# EAGLE board Carrier Motor Driver (EAGLE 9.6.2)
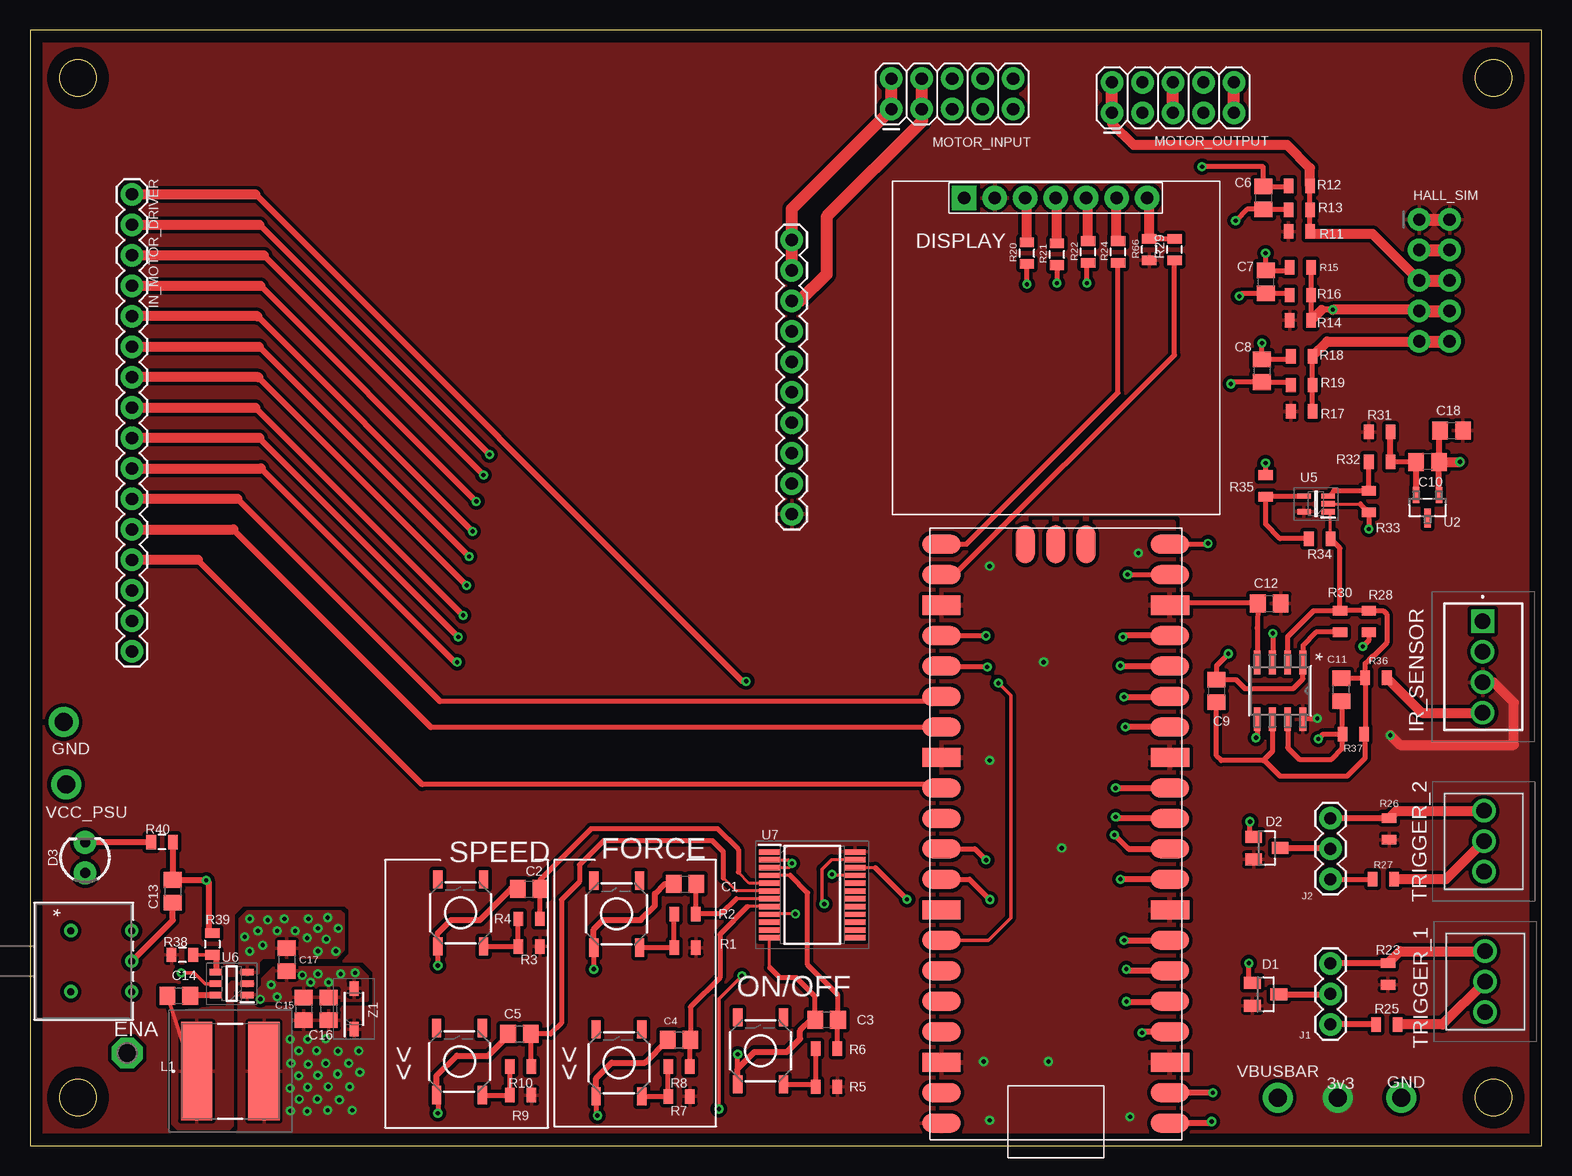
[diagram p0: board, top side]
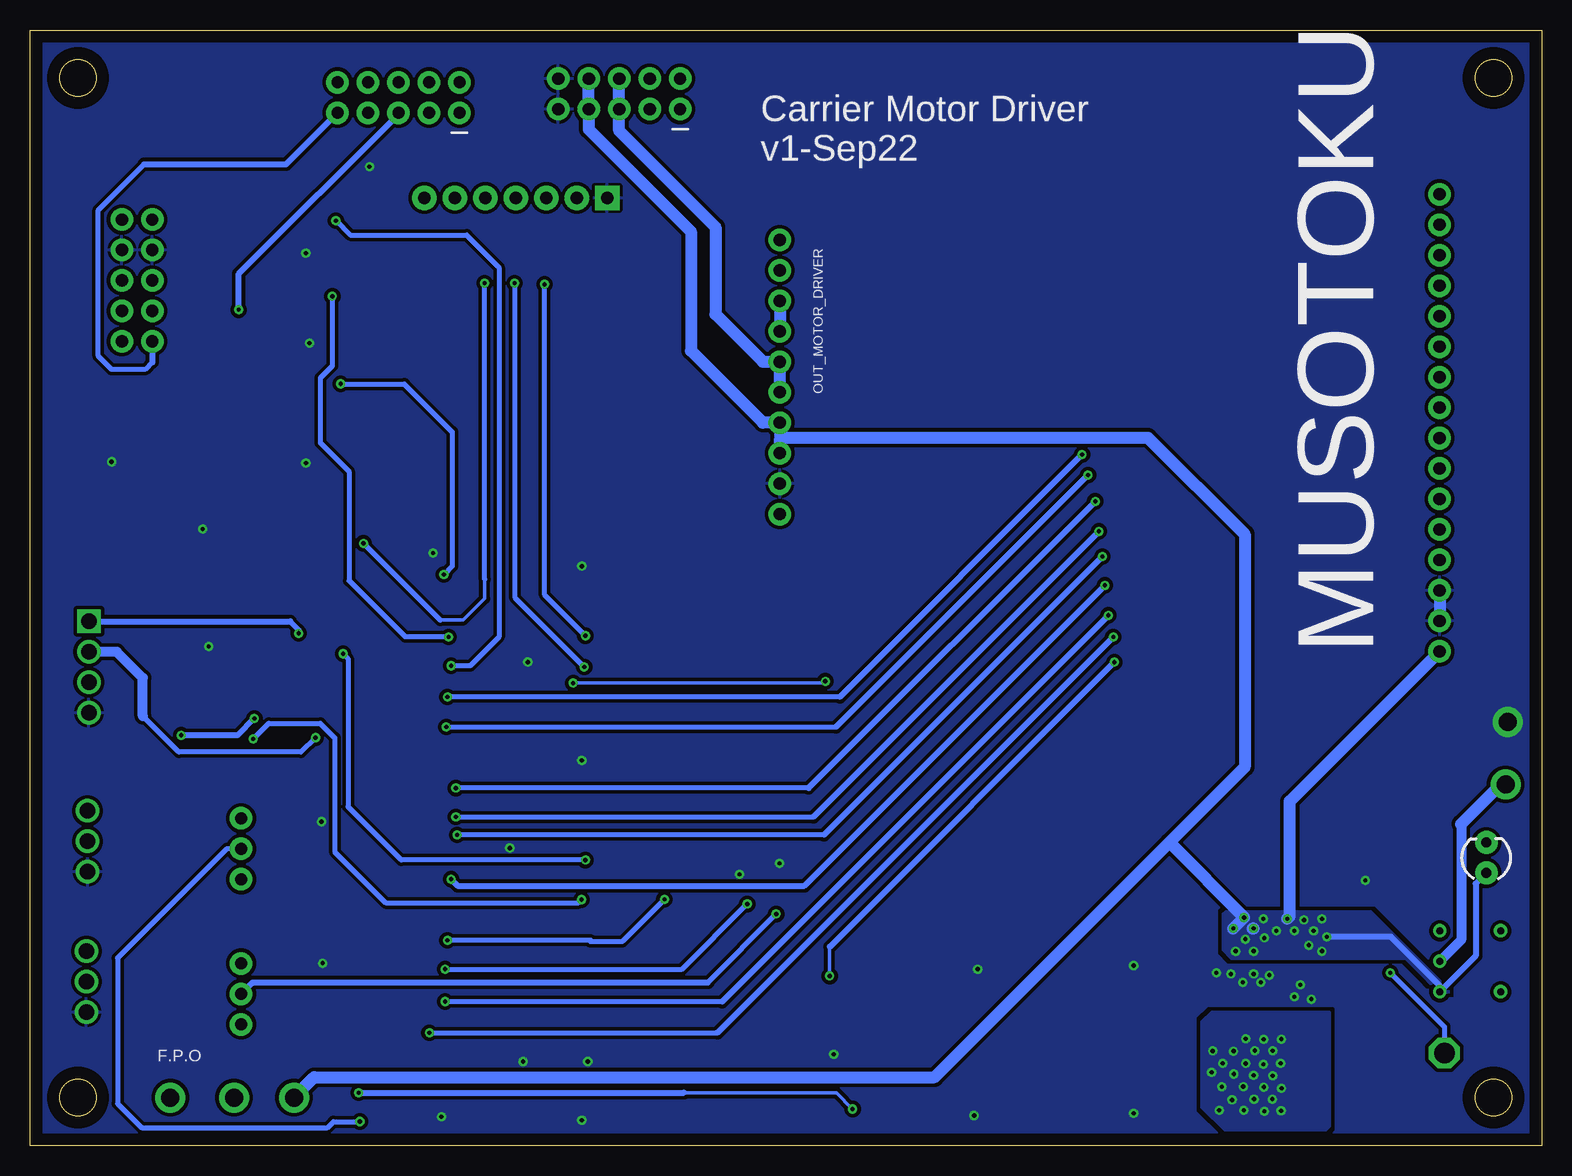
[diagram p1: board, bottom side, seen from below]

Size 126 x 93 mm. Coordinates in mm from the lower left corner, seen from the top.
Outline: 0,0 126,0 126,93 0,93 0,0
Outline: circle at 122,4 radius 1.5
Outline: circle at 122,89 radius 1.5
Outline: circle at 4,89 radius 1.5
Outline: circle at 4,4 radius 1.5
Copper layers (1*16): Top 0.035mm / dielectric 1.5mm / Bottom 0.035mm
Design rules "default *": minimum track width 6mil, minimum drill 0.35mm, track to track 12mil, track to pad 12mil, pad to pad 12mil, via to via 12mil, smd to smd 6mil, copper to edge 40mil, drill to drill 6mil, minimum pad ring 10mil, minimum via ring 8mil, stop-mask expansion 4mil, vias tented up to drill 0mil, thermal gap 10mil

## Footprints (pad centres in the part's own frame; a part is rotated, then mirrored left to right if it is on the bottom)
C0805 = smd 1.3 x 1.5: 1 -0.95,0; 2 0.95,0
SOT23 = smd 1 x 1.4: 1 -0.95,-1.1; 2 0.95,-1.1; 3 0,1.1
LED_3MM = drill 0.813 pad 1.88: A -1.27,0; K 1.27,0
OLED_LCD = drill 1.016 pad 2.032 square: 1 -7.42,13.7 | drill 1.016 pad 2.032: 2 -4.88,13.7; 3 -2.34,13.7; 4 0.2,13.7; 5 2.74,13.7; 6 5.28,13.7; 7 7.82,13.7
TESTPAD_P1-17 = drill 1.702 pad 2.54 octagon: TP 0,0
2X5_NOSILK = drill 1.016 pad 1.88: 1 0,0; 2 0,2.54; 3 2.54,0; 4 2.54,2.54; 5 5.08,0; 6 5.08,2.54; 7 7.62,0; 8 7.62,2.54; 9 10.16,0; 10 10.16,2.54
1X16 = drill 1.016 pad 1.88: 1 0,0; 2 2.54,0; 3 5.08,0; 4 7.62,0; 5 10.16,0; 6 12.7,0; 7 15.24,0; 8 17.78,0; 9 20.32,0; 10 22.86,0; 11 25.4,0; 12 27.94,0; 13 30.48,0; 14 33.02,0; 15 35.56,0; 16 38.1,0
OSTVN04A150 = drill 1.3 pad 1.95 square: 1 0,0 | drill 1.3 pad 1.95: 2 2.54,0; 3 5.08,0; 4 7.62,0
1X03 = drill 1.016 pad 1.88: 1 0,0; 2 2.54,0; 3 5.08,0
SRN80408R2Y = smd 2.6 x 8.2: 1 -2.8,0; 2 2.8,0
2X5 = drill 1.016 pad 1.88: 1 0,0; 2 0,2.54; 3 2.54,0; 4 2.54,2.54; 5 5.08,0; 6 5.08,2.54; 7 7.62,0; 8 7.62,2.54; 9 10.16,0; 10 10.16,2.54
1X10 = drill 1.016 pad 1.88: 1 0,0; 2 2.54,0; 3 5.08,0; 4 7.62,0; 5 10.16,0; 6 12.7,0; 7 15.24,0; 8 17.78,0; 9 20.32,0; 10 22.86,0
0805 = smd 0.8 x 1.2: 1 -0.9,0; 2 0.9,0
TACTILE_SWITCH_SMD_5.2MM = smd 1.524 x 0.762: 1 -2.794,1.905; 2 2.794,1.905; 3 -2.794,-1.905; 4 2.794,-1.905
OSTVN03A150 = drill 1.3 pad 1.95: 1 0,0; 2 2.54,0; 3 5.08,0
SOIC8-N_MC_MCH = smd 1.981 x 0.559: 1 -2.362,1.905; 2 -2.362,0.635; 3 -2.362,-0.635; 4 -2.362,-1.905; 5 2.362,-1.905; 6 2.362,-0.635; 7 2.362,0.635; 8 2.362,1.905
DBZ3 = smd 0.559 x 1.321: 1 -0.95,-1.016; 2 0.95,-1.016 | smd 0.559 x 1.587: 3 0,0.883
SPDT05_ATE1D_9P5X8_NDC = drill 0.61 pad 1.118: 1 5.08,5.08; 2 2.54,5.08; 3 0,5.08; 4 0,0; 5 5.08,0
RPI_PICO = smd 3.2 x 1.6: 3V3 9.525,13.97; 3V3_EN 9.525,16.51; ADC_VREF 9.525,11.43; AGND 9.525,6.35; GND@1 -9.525,19.05; GND@2 -9.525,6.35; GND@3 -9.525,-6.35; GND@4 -9.525,-19.05; GND@6 9.525,-19.05; GND@7 9.525,-6.35; GND@8 9.525,19.05; GP0 -9.525,24.13; GP1 -9.525,21.59; GP2 -9.525,16.51; GP3 -9.525,13.97; GP4 -9.525,11.43; GP5 -9.525,8.89; GP6 -9.525,3.81; GP7 -9.525,1.27; GP8 -9.525,-1.27; GP9 -9.525,-3.81; GP10 -9.525,-8.89; GP11 -9.525,-11.43; GP12 -9.525,-13.97; GP13 -9.525,-16.51; GP14 -9.525,-21.59; GP15 -9.525,-24.13; GP16 9.525,-24.13; GP17 9.525,-21.59; GP18 9.525,-16.51; GP19 9.525,-13.97; GP20 9.525,-11.43; GP21 9.525,-8.89; GP22 9.525,-3.81; GP26_A0 9.525,1.27; GP27_A1 9.525,3.81; GP28_A2 9.525,8.89; RUN 9.525,-1.27; VBUS 9.525,24.13; VSYS 9.525,21.59 | smd 1.6 x 3.2: GND@5 0,-24.13; SWCLK -2.54,-24.13; SWDIO 2.54,-24.13
SOT65P210X110-5N = smd 1.15 x 0.45: 1 -1,0.65; 2 -1,0; 3 -1,-0.65; 4 1,-0.65; 5 1,0.65
SOT95P280X100-6N = smd 1.05 x 0.55: 1 -1.3,0.95; 2 -1.3,0; 3 -1.3,-0.95; 4 1.3,-0.95; 5 1.3,0; 6 1.3,0.95
SOP65P780X200-24N = smd 1.8 x 0.45: 1 -3.55,3.575; 2 -3.55,2.925; 3 -3.55,2.275; 4 -3.55,1.625; 5 -3.55,0.975; 6 -3.55,0.325; 7 -3.55,-0.325; 8 -3.55,-0.975; 9 -3.55,-1.625; 10 -3.55,-2.275; 11 -3.55,-2.925; 12 -3.55,-3.575; 13 3.55,-3.575; 14 3.55,-2.925; 15 3.55,-2.275; 16 3.55,-1.625; 17 3.55,-0.975; 18 3.55,-0.325; 19 3.55,0.325; 20 3.55,0.975; 21 3.55,1.625; 22 3.55,2.275; 23 3.55,2.925; 24 3.55,3.575
SOD3716X135N = smd 1.2 x 0.75: 1 -1.7,0; 2 1.7,0

## Placement (x,y rotation side)
C1  [C0805]  54.6,21.8 0 top
C2  [C0805]  41.6,21.4 0 top
C3  [C0805]  66.4,10.5 0 top
C4  [C0805]  54.1,8.8 0 top
C5  [C0805]  40.8,9.3 0 top
C6  [C0805]  102.8,79 270 top
C7  [C0805]  103,72 270 top
C8  [C0805]  102.7,64.6 270 top
C9  [C0805]  98.9,37.9 270 top
C10  [C0805]  116.5,57 180 top
C11  [C0805]  109.3,38 90 top
C12  [C0805]  103.3,45.2 0 top
C13  [C0805]  11.9,21.2 270 top
C14  [C0805]  12.4,12.5 0 top
C15  [C0805]  22.8,11.4 270 top
C16  [C0805]  24.9,11.4 270 top
C17  [C0805]  21.4,15.5 270 top
C18  [C0805]  118.5,59.6 0 top
D1  BAT54S  [SOT23]  103,12.6 270 top
D2  BAT54S  [SOT23]  103.1,24.8 270 top
D3  [LED_3MM]  4.6,24 90 top
DISPLAY  Display  [OLED_LCD]  85.3,65.3 0 top
ENA  TESTPAD_TPSQPAD1-17  [TESTPAD_P1-17]  8.1,7.7 0 top
HALL_SIM  [2X5_NOSILK]  115.8,77.2 270 top
IN_MOTOR_DRIVER  [1X16]  8.5,79.3 270 top
IR_SENSOR  OSTVN04A150  [OSTVN04A150]  121.1,43.7 270 top
J1  [1X03]  108.4,10.1 90 top
J2  [1X03]  108.4,22.2 90 top
L1  SRN8040-8R2Y  [SRN80408R2Y]  16.7,6.2 0 top
MOTOR_INPUT  [2X5]  71.8,86.4 0 top
MOTOR_OUTPUT  [2X5]  90.2,86.1 0 top
OUT_MOTOR_DRIVER  [1X10]  63.5,75.5 270 top
R1  [0805]  54.6,16.5 0 top
R2  [0805]  54.6,19.3 180 top
R3  [0805]  41.6,16.6 0 top
R4  [0805]  41.6,18.9 180 top
R5  [0805]  66.4,4.9 0 top
R6  [0805]  66.4,8.1 180 top
R7  [0805]  54.1,4.1 0 top
R8  [0805]  54.1,6.6 180 top
R9  [0805]  40.9,4.2 0 top
R10  [0805]  40.9,6.6 180 top
R11  [0805]  105.8,76.2 180 top
R12  [0805]  105.8,80 0 top
R13  [0805]  105.8,78 0 top
R14  [0805]  105.9,68.8 180 top
R15  [0805]  105.9,73.2 0 top
R16  [0805]  105.9,70.9 0 top
R17  [0805]  106,61.2 180 top
R18  [0805]  106,65.8 0 top
R19  [0805]  106,63.4 0 top
R20  33  [0805]  83.1,74.4 90 top
R21  33  [0805]  85.6,74.3 90 top
R22  33  [0805]  88.2,74.5 90 top
R23  [0805]  113.2,14.3 90 top
R24  33  [0805]  90.7,74.5 90 top
R25  [0805]  113.1,10.1 0 top
R26  [0805]  113.3,26.4 90 top
R27  [0805]  112.8,22.2 0 top
R28  [0805]  111.6,43.7 90 top
R29  33  [0805]  95.4,74.7 90 top
R30  [0805]  109.2,43.7 270 top
R31  [0805]  112.5,59.5 180 top
R32  [0805]  112.5,57 180 top
R33  [0805]  111.6,53.7 270 top
R34  [0805]  107.5,50.6 180 top
R35  [0805]  103,55 90 top
R36  [0805]  112.2,39 180 top
R37  [0805]  110.3,34.3 180 top
R38  10K  [0805]  12.7,15.9 180 top
R39  10K  [0805]  15.2,16.8 270 top
R40  10K  [0805]  11,25.3 180 top
R66  10K  [0805]  93.3,74.7 90 top
S1  MOMENTARY-SWITCH-SPST-SMD-5.2MM  [TACTILE_SWITCH_SMD_5.2MM]  48.9,19.3 90 top
S2  MOMENTARY-SWITCH-SPST-SMD-5.2MM  [TACTILE_SWITCH_SMD_5.2MM]  35.9,19.4 90 top
S3  MOMENTARY-SWITCH-SPST-SMD-5.2MM  [TACTILE_SWITCH_SMD_5.2MM]  60.9,7.9 90 top
S4  MOMENTARY-SWITCH-SPST-SMD-5.2MM  [TACTILE_SWITCH_SMD_5.2MM]  49.1,6.9 90 top
S5  MOMENTARY-SWITCH-SPST-SMD-5.2MM  [TACTILE_SWITCH_SMD_5.2MM]  35.8,7 90 top
TRIGGER_1  OSTVN03A150  [OSTVN03A150]  121.3,16.2 270 top
TRIGGER_2  OSTVN03A150  [OSTVN03A150]  121.2,27.9 270 top
U1  MCP6002T-I/SN  [SOIC8-N_MC_MCH]  104.2,37.9 270 top
U2  LM4040BIM3-2.0/NOPB  [DBZ3]  116.5,53.2 180 top
U3  ATE1D-5M3-10-Z  [SPDT05_ATE1D_9P5X8_NDC]  3.4,17.9 270 top
U4  [RPI_PICO]  85.5,26 180 top
U5  MCP6001T-I_LT  [SOT65P210X110-5N]  107.2,53.5 180 top
U6  AP62200WU-7  [SOT95P280X100-6N]  16.8,13.5 180 top
U7  PCF8575DB  [SOP65P780X200-24N]  65.2,20.9 0 top
Z1  BZT52C3V6-7-F  [SOD3716X135N]  27,11.4 90 top

## Library data of the parts
C1-C18 = rcl; SPICEPREFIX: C
D1 D2 = diode
D3 = SparkFun-LED; PROD_ID: DIO-08794
DISPLAY = EDCPSU
ENA = BeagleBone_Blue_R3
HALL_SIM IN_MOTOR_DRIVER J1 J2 = SparkFun-Connectors
IR_SENSOR = OSTVN04A150; ARROW_PART_NUMBER: OSTVN04A150; ARROW_PRICE-STOCK: https://www.arrow.com/en/products/ostvn04a150/on-shore-technology?region=nac; DESCRIPTION: Conn Terminal Block 4 POS 2.54mm Solder ST Thru-Hole 6A; HEIGHT: 8.8mm; MANUFACTURER_NAME: On-Shore Technology, Inc; MANUFACTURER_PART_NUMBER: OSTVN04A150
L1 = SRN8040-8R2Y; ARROW_PART_NUMBER: SRN8040-8R2Y; ARROW_PRICE-STOCK: https://www.arrow.com/en/products/srn8040-8r2y/bourns; DESCRIPTION: Bourns, SRN8040, 8040 Shielded Wire-wound SMD Inductor with a Ferrite Core, 8.2 uH +/-30% Wire-Wound 4A Idc; HEIGHT: 4mm; MANUFACTURER_NAME: Bourns; MANUFACTURER_PART_NUMBER: SRN8040-8R2Y; MOUSER_PART_NUMBER: 652-SRN8040-8R2Y; MOUSER_PRICE-STOCK: https://www.mouser.co.uk/ProductDetail/Bourns/SRN8040-8R2Y?qs=opBjA1TV903pPxFXaQmF%2Fw%3D%3D
MOTOR_INPUT MOTOR_OUTPUT = SparkFun-Connectors; PROD_ID: CONN-08499; SF_ID: PRT-0778
OUT_MOTOR_DRIVER = SparkFun-Connectors; PROD_ID: CONN-11563
R1-R19 R23 R25-R28 R30-R37 = SparkFun-Resistors
R20-R22 R24 R29 R38-R40 R66 = SparkFun
S1-S5 = SparkFun-Switches; PROD_ID: SWCH-08247; SF_SKU: COM-08720
TRIGGER_1 TRIGGER_2 = OSTVN03A150; ARROW_PART_NUMBER: OSTVN03A150; ARROW_PRICE-STOCK: https://www.arrow.com/en/products/ostvn03a150/on-shore-technology; DESCRIPTION: OSTVN03A150; HEIGHT: 8.8mm; MANUFACTURER_NAME: On-Shore Technology, Inc; MANUFACTURER_PART_NUMBER: OSTVN03A150
U1 = MCP6002T; COPYRIGHT: Copyright (C) 2022 Ultra Librarian. All rights reserved.; DIGI-KEY_PART_NUMBER_1: MCP6002T-I/SNCT-ND; DIGI-KEY_PART_NUMBER_2: MCP6002T-I/SNDKR-ND; DIGI-KEY_PART_NUMBER_3: MCP6002T-I/SNTR-ND; MANUFACTURER_PART_NUMBER: MCP6002T-I/SN; MFR_NAME: Microchip
U2 = lm4040; DATASHEET_URL: http://www.ti.com/lit/gpn/LM4040D50; DESCRIPTION: 5-V Precision Micropower Shunt Voltage Reference, 1% accuracy; FAMILY_NAME: SHUNT VOLTAGE REFERENCE; GENERIC_PART_NUMBER: LM4040D50; INDUSTRY_STD_PKG_TYPE: SOT-23; MANUFACTURER: Texas Instruments; MANUFACTURER_PART_NUMBER: LM4040BIM3-2.0/NOPB; PACKAGE_DESIGNATOR: DBZ; PIN_COUNT: 3; VENDOR: Texas Instruments
U3 = ATE1D-5M3-10-Z; COPYRIGHT: Copyright (C) 2022 Ultra Librarian. All rights reserved.; DIGI-KEY_PART_NUMBER_1: 563-1158-ND; MANUFACTURER_PART_NUMBER: ATE1D-5M3-10-Z; MFR_NAME: Nidec Copal Electronics
U4 = RaspberryPi_Pico
U5 = MCP6001T-I_LT; ARROW_PART_NUMBER: MCP6001T-I/LT; ARROW_PRICE-STOCK: https://www.arrow.com/en/products/mcp6001t-ilt/microchip-technology?region=nac; DESCRIPTION: Microchip MCP6001T-I/LT Low Power Op Amp, 1MHz Rail-Rail, 1.8 6 V, 5-Pin SC-70; HEIGHT: 1.1mm; MANUFACTURER_NAME: Microchip; MANUFACTURER_PART_NUMBER: MCP6001T-I/LT; MOUSER_PART_NUMBER: 579-MCP6001T-I/LT; MOUSER_PRICE-STOCK: https://www.mouser.co.uk/ProductDetail/Microchip-Technology-Atmel/MCP6001T-I-LT?qs=Q%2Fw7XRh99il03y7Zr5Ze0Q%3D%3D
U6 = AP62200WU-7; ARROW_PART_NUMBER: AP62200WU-7; ARROW_PRICE-STOCK: https://www.arrow.com/en/products/ap62200wu-7/diodes-incorporated?region=nac; DESCRIPTION: Switching Voltage Regulators DCDC Conv HV Buck TSOT26 T&R 3K; HEIGHT: 1mm; MANUFACTURER_NAME: Diodes Inc.; MANUFACTURER_PART_NUMBER: AP62200WU-7; MOUSER_PART_NUMBER: 621-AP62200WU-7; MOUSER_PRICE-STOCK: https://www.mouser.co.uk/ProductDetail/Diodes-Incorporated/AP62200WU-7?qs=P1JMDcb91o6Lrrt3Idazjw%3D%3D
U7 = PCF8575DB; ARROW_PART_NUMBER: PCF8575DB; ARROW_PRICE-STOCK: https://www.arrow.com/en/products/pcf8575db/texas-instruments?region=nac; DESCRIPTION: Interface - I/O Expanders Remote 16B I2C and SMBus I/O Expander; HEIGHT: 2mm; MANUFACTURER_NAME: Texas Instruments; MANUFACTURER_PART_NUMBER: PCF8575DB; MOUSER_PART_NUMBER: 595-PCF8575DB; MOUSER_PRICE-STOCK: https://www.mouser.co.uk/ProductDetail/Texas-Instruments/PCF8575DB?qs=fJz2RDGtR42Mo54dhvfjsQ%3D%3D
Z1 = BZT52C3V6-7-F; ARROW_PART_NUMBER: BZT52C3V6-7-F; ARROW_PRICE-STOCK: https://www.arrow.com/en/products/bzt52c3v6-7-f/diodes-incorporated?region=nac; DESCRIPTION: Diodes Inc BZT52C3V6-7-F Zener Diode, 3.6V 6% 500 mW SMT 2-Pin SOD-123; HEIGHT: 1.35mm; MANUFACTURER_NAME: Diodes Inc.; MANUFACTURER_PART_NUMBER: BZT52C3V6-7-F; MOUSER_PART_NUMBER: 621-BZT52C3V6-F; MOUSER_PRICE-STOCK: https://www.mouser.co.uk/ProductDetail/Diodes-Incorporated/BZT52C3V6-7-F?qs=We1mx2pNWM9dxcfB67aIQA%3D%3D

## Nets
CS: DISPLAY.7 R29.2 R66.2
D0: DISPLAY.3 R20.2
D1: DISPLAY.4 R21.2
DSP_RST: R22.1 U4.GP15
EN_0: IN_MOTOR_DRIVER.4 U4.GP9
EN_1: IN_MOTOR_DRIVER.2 U4.GP11
EN_2: IN_MOTOR_DRIVER.8 U4.GP3
EN_3: IN_MOTOR_DRIVER.6 U4.GP7
EN_4: IN_MOTOR_DRIVER.12 U4.GP21
EN_5: IN_MOTOR_DRIVER.10 U4.GP1
EN_DCDC: ENA.TP U6.5
FRC_DOWN: C4.2 R8.1 U7.8
FRC_UP: C1.2 R2.1 U7.7
GND: C1.1 C2.1 C3.1 C4.1 C5.1 C6.1 C7.1 C8.1 C10.1 C12.1 C13.1 C15.1 C16.1 C17.2 C18.1 D1.1 D2.1 DISPLAY.1 HALL_SIM.3 HALL_SIM.4 IN_MOTOR_DRIVER.14 IN_MOTOR_DRIVER.15 IR_SENSOR.4 MOTOR_INPUT.9 MOTOR_INPUT.10 OUT_MOTOR_DRIVER.9 R12.1 R15.1 R18.1 R28.1 R33.2 R35.2 R36.1 R39.1 R40.1 S1.1 S2.1 S3.1 S4.1 S5.1 TRIGGER_1.3 TRIGGER_2.3 U1.4 U2.1 U4.GND@1 U4.GND@2 U4.GND@3 U4.GND@4 U4.GND@6 U4.GND@7 U4.GND@8 U5.2 U6.1 U7.2 U7.3 U7.12 U7.21 Z1.2
HALL_A: HALL_SIM.5 HALL_SIM.6 MOTOR_OUTPUT.1 MOTOR_OUTPUT.2 R11.1 R12.2 R13.2
HALL_B: HALL_SIM.7 HALL_SIM.8 MOTOR_OUTPUT.5 MOTOR_OUTPUT.6 R14.1 R15.2 R16.2
HALL_C: HALL_SIM.9 HALL_SIM.10 MOTOR_OUTPUT.9 MOTOR_OUTPUT.10 R17.1 R18.2 R19.2
IN_SENSOR_1: IR_SENSOR.1 U1.3
IN_SENSOR_2: IR_SENSOR.2 U1.5
ISENSE: IN_MOTOR_DRIVER.1 U4.GP28_A2
MISO: R24.1 U4.GP16
MOSI: R21.1 U4.GP19
MOTOR_A: MOTOR_INPUT.1 MOTOR_INPUT.2 OUT_MOTOR_DRIVER.1 OUT_MOTOR_DRIVER.2
MOTOR_B: MOTOR_INPUT.3 MOTOR_INPUT.4 OUT_MOTOR_DRIVER.3 OUT_MOTOR_DRIVER.4
MOTOR_C: MOTOR_INPUT.5 MOTOR_INPUT.6 OUT_MOTOR_DRIVER.5 OUT_MOTOR_DRIVER.6
N$1: R1.1 R2.2 S1.3
N$3: R3.1 R4.2 S2.3
N$5: R5.1 R6.2 S3.3
N$6: R34.2 R35.1 U5.4
N$7: R7.1 R8.2 S4.3
N$8: R32.2 R33.1 U5.3
N$9: R9.1 R10.2 S5.3
N$10: C10.2 R31.1 R32.1 U2.2
N$17: DISPLAY.6 R24.2
N$18: J2.3 R26.2 TRIGGER_2.1
N$19: R27.2 TRIGGER_2.2
N$21: J1.3 R23.2 TRIGGER_1.1
N$22: R25.2 TRIGGER_1.2
N$23: J2.1 R27.1
N$24: J1.1 R25.1
N$28: D3.K R40.2
N$31: C14.2 U6.6
N$32: C14.1 L1.1 U6.2
N$33: R38.1 R39.2 U6.4
ON/OFF: C3.2 R6.1 U7.4
PWM_IN_0: IN_MOTOR_DRIVER.5 U4.GP8
PWM_IN_1: IN_MOTOR_DRIVER.3 U4.GP10
PWM_IN_2: IN_MOTOR_DRIVER.9 U4.GP2
PWM_IN_3: IN_MOTOR_DRIVER.7 U4.GP6
PWM_IN_4: IN_MOTOR_DRIVER.13 U4.GP22
PWM_IN_5: IN_MOTOR_DRIVER.11 U4.GP20
RST: DISPLAY.5 R22.2
SCK: R20.1 U4.GP18
SCL: U4.GP5 U7.22
SDA: U4.GP4 U7.23
SENSOR_1: C9.1 R30.2 U1.1 U4.GP26_A0
SENSOR_2: C11.1 R37.2 U1.7 U4.GP27_A1
SENSOR_A: C6.2 R13.1 U4.GP12
SENSOR_B: C7.2 R16.1 U4.GP13
SENSOR_C: C8.2 R19.1 U4.GP14
SPD_DOWN: C5.2 R10.1 U7.6
SPD_UP: C2.2 R4.1 U7.5
SS: R29.1 U4.GP17
T1: D1.3 J1.2 U7.9
T2: D2.3 J2.2 U4.GP0
V_COMP: C9.2 C11.2 R28.2 R30.1 R34.1 R36.2 R37.1 U1.2 U1.6 U5.1
VBUSBAR: C17.1 D3.A IN_MOTOR_DRIVER.16 MOTOR_INPUT.7 MOTOR_INPUT.8 OUT_MOTOR_DRIVER.7 OUT_MOTOR_DRIVER.8 U3.1 U6.3
VCC: C12.2 C15.2 C16.2 C18.2 D1.2 D2.2 DISPLAY.2 HALL_SIM.1 HALL_SIM.2 IR_SENSOR.3 L1.2 OUT_MOTOR_DRIVER.10 R1.2 R3.2 R5.2 R7.2 R9.2 R11.2 R14.2 R17.2 R23.1 R26.1 R31.2 R38.2 R66.1 U1.8 U4.VBUS U5.5 U7.24 Z1.1
VCC_PSU: C13.2 U3.2

## Tracks (layer width: path | path; a pad name or v marks a point on that pad's centre or on a via)
CS
  Top 0.406: 93.3,78.82 DISPLAY.7 | R66.2 R29.2
  Top 0.813: R66.2 93.3,78.82
D0
  Top 0.406: 83.1,78.86 DISPLAY.3
  Top 0.813: R20.2 83.1,78.86
D1
  Top 0.406: 85.6,78.9 DISPLAY.4
  Top 0.813: R21.2 85.6,78.9
DSP_RST  (via drill 0.35)
  Top 0.406: U4.GP15 98.13,50.13 v98.2,50.2 | v88.1,71.9 88.1,73.5 R22.1
  Bottom 0.305: 91.8,43.8 89.9,43.8 88.1,45.6 88.1,47.2
  Bottom 0.406: v98.2,50.2 91.8,43.8 | 88.1,47.2 v88.1,71.9
EN_0  (via drill 0.35)
  Top 0.406: 95.02,29.8 U4.GP9
  Top 0.508: 19.22,71.68 v37.2,53.7 | v90.5,29.8 95.02,29.8
  Top 0.813: IN_MOTOR_DRIVER.4 19.22,71.68
  Bottom 0.406: 61.1,29.8 v90.5,29.8
  Bottom 0.508: v37.2,53.7 61.1,29.8
EN_1  (via drill 0.35)
  Top 0.406: 95,37.4 U4.GP11
  Top 0.508: 19.14,76.76 v38.3,57.6 | v91.2,37.4 95,37.4
  Top 0.813: IN_MOTOR_DRIVER.2 19.14,76.76
  Bottom 0.406: 58.5,37.4 v91.2,37.4
  Bottom 0.508: v38.3,57.6 58.5,37.4
EN_2  (via drill 0.35)
  Top 0.406: 95,12 U4.GP3
  Top 0.508: 18.78,61.52 v36.1,44.2 | v91.4,12 95,12
  Top 0.813: IN_MOTOR_DRIVER.8 18.78,61.52
  Bottom 0.406: 68.3,12 v91.4,12
  Bottom 0.508: v36.1,44.2 68.3,12
EN_3  (via drill 0.35)
  Top 0.406: v90.4,25.9 91.57,24.73
  Top 0.508: 19.1,66.6 v36.6,49.1 | 91.57,24.73 U4.GP7
  Top 0.813: IN_MOTOR_DRIVER.6 19.1,66.6
  Bottom 0.406: 59.8,25.9 v90.4,25.9
  Bottom 0.508: v36.6,49.1 59.8,25.9
EN_4
  Top 0.406: 33.41,34.89 U4.GP21
  Top 0.508: 16.94,51.36 33.41,34.89
  Top 0.813: IN_MOTOR_DRIVER.12 16.94,51.36
EN_5  (via drill 0.35)
  Top 0.305: v57.43,3.04 57.43,12.22 v59.34,14.13
  Top 0.406: 35.4,40.3 v35.6,40.3 | v98.6,4.4 v98.59,4.41
  Top 0.508: v98.59,4.41 U4.GP1 | 19.26,56.44 35.4,40.3
  Top 0.813: IN_MOTOR_DRIVER.10 19.26,56.44
  Bottom 0.305: 71.5,4.4 58.79,4.4 v57.43,3.04 | v59.34,14.13 59.34,16.56 59.32,16.58
  Bottom 0.508: v35.6,40.3 59.32,16.58 | v98.6,4.4 71.5,4.4
EN_DCDC  (via drill 0.35)
  Top 0.305: U6.5 14.6,13.5 13.7,14.4 12.8,14.4
  Top 0.406: v12.6,14.4 12.8,14.4
  Bottom 0.406: v12.6,14.4 8.1,9.9 ENA.TP
FRC_DOWN
  Top 0.254: U7.8 59.83,19.93
  Top 0.406: R8.1 55,8.75 C4.2 55.05,11.55 57.5,14 57.5,17.6 59.83,19.93
FRC_UP
  Top 0.254: U7.7 58.88,20.57
  Top 0.406: C1.2 55.5,21.75 R2.1 57.6,19.3 58.88,20.57
GND  (via drill 0.35, 1.5 pad 2.5)
  Top 0.254: 61.65,14.85 U7.12 | U5.2 110.9,53.5 | U7.3 63.27,23.18 63.52,23.42 v63.52,23.52 63.22,23.82 U7.2 | U7.21 66.89,22.52 66.86,22.55 v66.86,22.6
  Top 0.305: 14.65,22.15 v14.7,22.1 | R39.1 14.9,18
  Top 0.406: v34,15 v33.99,15.01 S2.1 33.99,17.71 | S5.1 34,4.1 v34,2.7 | S4.1 47.2,2.6 v47.3,2.5 | S3.1 v58.99,7.59 v59,7.6 | S1.1 v46.99,14.71 v47,14.7 | 65.1,10.5 C3.1 65.45,12.45 63.9,14 62.5,14 61.65,14.85 | 52.9,21.8 C1.1 | 40.1,21.4 C2.1 | 39.85,9.15 C5.1 | 84.95,6.95 v84.9,7 | U1.4 102.3,43.14 102.3,43.15 C12.1 102.3,45.25 95.53,45.25 94.92,44.65 94.92,44.95 U4.GND@4 | 110.9,53.5 R33.2 v111.6,51.4 | C18.1 117.45,59.5 | R15.1 104.75,72.95 C7.1 v103,74.4 | R12.1 104.85,79.95 C6.1 102.8,81.6 v97.7,81.6 | R18.1 104.85,65.55 C8.1 v102.7,66.9 | D1.1 101.6,13.85 v101.6,15.2 | D2.1 101.7,26.05 v101.7,27 | R28.1 111.6,42.1 v111.1,41.6 | R35.2 v103,56.9
  Top 0.508: R40.1 C13.1 14.65,22.15 | v14.7,22.1 14.9,21.9 14.9,18 | S3.1 58.99,6.41 60.39,7.8 63.1,7.8 64.2,8.9 64.2,9.6 65.1,10.5 | S1.1 46.99,18.01 47.79,18.8 50.9,18.8 52.1,20 52.1,21 52.9,21.8 | 33.99,17.71 35.09,18.8 37.5,18.8 40.1,21.4 | S4.1 47.2,5.61 48.49,6.9 51.25,6.9 C4.1 | S5.1 33.9,5.79 35.6,7.5 38.2,7.5 39.85,9.15 | U2.1 C10.1 117.45,59.5
  Top 0.813: R36.1 116.02,36.08 IR_SENSOR.4 | C10.1 v119.2,57
  Top 1.016: HALL_SIM.3 HALL_SIM.4
  Bottom 1.016: IN_MOTOR_DRIVER.14 IN_MOTOR_DRIVER.15
  other vias: 19.2,12.2 20.1,13.4 20.6,12.4 22.7,14.2 23.4,13.6 24,14.3 24.9,13.6 25.9,14.3 27.1,14.4 79.5,7 80,2.1 91.7,2.4 86,24.8 80,32.1 84.5,40.3 80,48.3 92.4,49.4 2.8,35.3
  pour Top (rank 2): 17.4,12.7 18.8,12.7 19.4,13.3 19.4,13.9 20.3,14.8 27.4,14.8 28.1,14.1 28.1,12.1 17.4,12.1
  pour Bottom: 17.6,12.6 18.7,12.6 19.3,13.2 19.3,13.8 20.2,14.7 27.3,14.7 28,14 28,12 17.6,12
  pour Top (isolate 0.254): 75,52 95.3,52 95.3,1 76,1 76,51
  pour Bottom (rank 2): -6,97 -6,-4 133,-4 133,97
GND1  (via drill 1.5 pad 2.5)
  other vias: 114.3,4
HALL_A
  Top 0.406: 106.9,76 R11.1 R13.2 R12.2 | 90.2,85.2 MOTOR_OUTPUT.1
  Top 0.813: HALL_SIM.5 111.92,76 106.9,76 | R12.2 106.7,81.5 104.8,83.4 92,83.4 90.2,85.2
  Top 1.016: MOTOR_OUTPUT.1 MOTOR_OUTPUT.2 | HALL_SIM.5 HALL_SIM.6
HALL_B  (via drill 0.35)
  Top 0.406: R14.1 R16.2 R15.2
  Top 0.508: HALL_SIM.7 115.7,69.68 | v108.6,69.68 107.68,69.68
  Top 0.813: 115.7,69.68 v108.6,69.68 | 107.68,69.68 R14.1
  Top 1.016: HALL_SIM.7 HALL_SIM.8 | MOTOR_OUTPUT.5 MOTOR_OUTPUT.6
  Bottom 0.508: v108.6,69.68 108.6,72.68 95.28,86 MOTOR_OUTPUT.5
HALL_C
  Top 0.406: R18.2 R19.2 R17.1
  Top 0.813: R18.2 108.14,67.04 HALL_SIM.9
  Top 1.016: HALL_SIM.9 HALL_SIM.10 | MOTOR_OUTPUT.9 MOTOR_OUTPUT.10
  Bottom 0.406: 115.8,65.3 116.4,64.7 119.2,64.7 120.3,65.8 120.3,78 116.5,81.8
  Bottom 0.508: HALL_SIM.9 115.8,65.3 | 116.5,81.8 104.66,81.8 MOTOR_OUTPUT.9
IN_SENSOR_1  (via drill 0.35)
  Top 0.406: v103.6,42.7 103.6,40.3 U1.3
  Bottom 0.406: v103.6,42.7 103.6,43 104.3,43.7
  Bottom 0.508: IR_SENSOR.1 104.3,43.7
IN_SENSOR_2  (via drill 0.35)
  Top 0.406: U1.5 102.3,34.09 v102.2,34
  Bottom 0.406: v102.2,34 103.4,32.8 113.6,32.8 116.6,35.8
  Bottom 0.813: 116.6,35.8 116.6,39 118.76,41.16 IR_SENSOR.2
ISENSE  (via drill 0.35)
  Top 0.305: U4.GP28_A2 79.88,17.11 81.75,18.98 81.75,37.52 v80.72,38.55
  Top 0.508: v59.7,38.7 59.4,38.7 18.8,79.3
  Top 0.813: IN_MOTOR_DRIVER.1 18.8,79.3
  Bottom 0.305: v80.72,38.55 59.85,38.55 v59.7,38.7
MISO
  Top 0.406: U4.GP16 78.08,50.13 90.7,62.76 R24.1
MOSI  (via drill 0.35)
  Top 0.406: R21.1 v85.6,71.9 | v79.8,39.9 76.05,39.9 U4.GP19
  Bottom 0.406: v85.6,71.9 85.6,45.7 v79.8,39.9
MOTOR_A
  Top 1.016: OUT_MOTOR_DRIVER.2 OUT_MOTOR_DRIVER.1 63.5,78.1 MOTOR_INPUT.1 MOTOR_INPUT.2
MOTOR_B
  Top 1.016: OUT_MOTOR_DRIVER.3 64.2,70.42 66.4,72.62 66.4,77.42 74.34,85.36 MOTOR_INPUT.3 MOTOR_INPUT.4
  Bottom 1.016: OUT_MOTOR_DRIVER.3 OUT_MOTOR_DRIVER.4
MOTOR_C
  Bottom 1.016: OUT_MOTOR_DRIVER.6 OUT_MOTOR_DRIVER.5 64.9,65.34 68.86,69.3 68.86,76.58 76.88,84.6 MOTOR_INPUT.5 MOTOR_INPUT.6
N$1
  Top 0.406: S1.3 R1.1 R2.2
N$3
  Top 0.406: S2.3 R3.1 R4.2
N$5
  Top 0.406: S3.3 65.29,5.11 R5.1 R6.2
N$6
  Top 0.406: R34.2 104.2,50.6 103,51.8 R35.1 103.05,54.15 U5.4
N$7
  Top 0.406: S4.3 R7.1 R8.2
N$8
  Top 0.254: U5.3 108.65,54.6
  Top 0.406: 108.65,54.6 R33.1 R32.2
N$9
  Top 0.305: 40,6.5 R10.2
  Top 0.406: S5.3 R9.1 40,6.5
N$10
  Top 0.406: C10.2 R32.1
  Top 0.508: U2.2 C10.2 | R32.1 R31.1
N$17
  Top 0.406: R24.2 90.58,75.52
  Top 0.813: 90.58,75.52 DISPLAY.6
N$18
  Top 0.406: J2.3 108.42,27.3
  Top 0.508: 108.42,27.3 R26.2
  Top 0.813: R26.2 113.9,27.9 TRIGGER_2.1
N$19
  Top 0.813: TRIGGER_2.2 118.04,22.2 R27.2
N$21
  Top 0.406: 108.42,15.2 J1.3
  Top 0.508: R23.2 108.42,15.2
  Top 0.813: R23.2 114.2,16.2 TRIGGER_1.1
N$22
  Top 0.813: TRIGGER_1.2 117.74,10.1 R25.2
N$23
  Top 0.406: J2.1 R27.1
N$24
  Top 0.508: R25.1 J1.1
N$28
  Top 0.305: R40.2 10.07,25.27
  Top 0.508: 10.07,25.27 D3.K
N$31
  Top 0.305: C14.2 13.37,12.55
  Top 0.508: 13.37,12.55 U6.6
N$32
  Top 0.305: L1.1 13.3,6.8 C14.1
  pour Top (isolate 0.254): 16.8,13.6 18.6,13.6 18.6,13.3 17.31,13.3 16.85,12.84 16.85,1.65 16.6,1.4 12.3,1.4 11.9,1.8 11.9,11.1 15,11.5 16.3,11.5 16.5,11.7 16.5,13.3
N$33
  Top 0.305: R38.1 R39.2 15.5,15.6
  Top 0.508: 15.5,15.6 U6.4
ON/OFF
  Top 0.254: 63.38,22.52 U7.4
  Top 0.406: R6.1 67.3,10.45 C3.2 67.35,12.55 64.83,15.07 64.83,21.07 63.38,22.52
PWM_IN_0  (via drill 0.35)
  Top 0.406: 90.63,27.27 v90.5,27.4
  Top 0.508: U4.GP8 90.63,27.27 | v36.9,51.2 18.96,69.14
  Top 0.813: 18.96,69.14 IN_MOTOR_DRIVER.5
  Bottom 0.406: v90.5,27.4 60.7,27.4
  Bottom 0.508: 60.7,27.4 v36.9,51.2
PWM_IN_1  (via drill 0.35)
  Top 0.406: v91.31,34.89 v91.3,34.9
  Top 0.508: U4.GP10 v91.31,34.89 | 19.48,74.22 v37.8,55.9
  Top 0.813: IN_MOTOR_DRIVER.3 19.48,74.22
  Bottom 0.406: v91.3,34.9 58.8,34.9
  Bottom 0.508: 58.8,34.9 v37.8,55.9
PWM_IN_2  (via drill 0.35)
  Top 0.406: 92.79,9.49 v92.7,9.4
  Top 0.508: U4.GP2 92.79,9.49 | v35.7,42.4 19.12,58.98
  Top 0.813: 19.12,58.98 IN_MOTOR_DRIVER.9
  Bottom 0.406: v92.7,9.4 68.7,9.4
  Bottom 0.508: 68.7,9.4 v35.7,42.4
PWM_IN_3  (via drill 0.35)
  Top 0.406: v90.91,22.19 v90.9,22.2
  Top 0.508: U4.GP6 v90.91,22.19 | v36.4,46.7 19.04,64.06
  Top 0.813: 19.04,64.06 IN_MOTOR_DRIVER.7
  Bottom 0.508: v90.9,22.2 90.36,21.66 61.44,21.66 v36.4,46.7
PWM_IN_4
  Top 0.406: U4.GP22 75.67,30.11 32.69,30.11
  Top 0.508: 32.69,30.11 13.98,48.82
  Top 0.813: 13.98,48.82 IN_MOTOR_DRIVER.13
PWM_IN_5
  Top 0.406: U4.GP20 75.58,37.03 34.17,37.03
  Top 0.508: 34.17,37.03 17.3,53.9
  Top 0.813: 17.3,53.9 IN_MOTOR_DRIVER.11
RST
  Top 0.406: 88.2,78.84 DISPLAY.5
  Top 0.813: R22.2 88.2,78.84
SCK  (via drill 0.35)
  Top 0.406: U4.GP18 v79.69,42.51 v79.7,42.5 | v83.1,71.8 R20.1
  Bottom 0.406: v79.7,42.5 83.1,45.9 v83.1,71.8
SCL  (via drill 0.35)
  Top 0.254: U7.22 70.45,23.18
  Top 0.406: 70.45,23.18 v73.11,20.52 | v91.2,17.1 v91.21,17.11
  Top 0.508: v91.21,17.11 U4.GP5
  Bottom 0.406: v73.11,20.52 76.62,17.01 79.29,17.01 79.2,17.1 v91.2,17.1
SDA  (via drill 0.35)
  Top 0.254: U7.23 66.82,23.82
  Top 0.305: v66.21,20.13 66.02,20.32 66.02,23.02 66.82,23.82
  Top 0.406: 91.53,14.57 v91.4,14.7
  Top 0.508: U4.GP4 91.53,14.57
  Bottom 0.406: v91.4,14.7 71.64,14.7 v66.21,20.13
SENSOR_1  (via drill 0.35)
  Top 0.406: R30.2 107.2,42.8 106.11,41.7 U1.1 106.11,38.91 105.3,38.1 101.25,38.1 100.5,38.85 C9.1 98.9,40 v99.9,41 | U4.GP26_A0 78.77,24.73 v79.7,23.8
  Bottom 0.406: v99.9,41 99.5,40.6 99.5,28.24 95.06,23.8 v79.7,23.8
SENSOR_2  (via drill 0.35)
  Top 0.406: U1.7 104.83,33.16 105.8,32.2 108.5,32.2 109.4,33.1 R37.2 | R37.2 109.4,36.95 C11.1 | U4.GP27_A1 78.33,22.19 v80.02,20.5 | v107.4,33.9 107.8,34.3 R37.2
  Bottom 0.406: v80.02,20.5 80.32,20.2 96.3,20.2 100.6,24.5 100.6,34 101.8,35.2 106.1,35.2 v107.4,33.9
SENSOR_A  (via drill 0.35)
  Top 0.406: R13.1 104.85,78.05 C6.2 101.45,78.05 v100.5,77.1 | 95,40 U4.GP12
  Top 0.508: v90.9,40 95,40
  Bottom 0.406: v100.5,77.1 99.3,75.9 89.6,75.9 86.9,73.2 86.9,42.4 89.3,40 v90.9,40
SENSOR_B  (via drill 0.35)
  Top 0.406: R16.1 104.85,71.05 C7.2 101.05,71.05 v100.8,70.8 | 91.21,42.51 v91.1,42.4
  Top 0.508: U4.GP13 91.21,42.51
  Bottom 0.406: v91.1,42.4 94.7,42.4 99.4,47.1 99.4,56.2 101.8,58.6 101.8,64 100.8,65 v100.8,70.8
SENSOR_C  (via drill 0.35)
  Top 0.406: R19.1 104.85,63.65 C8.2 100.25,63.65 v100.1,63.5 | v91.5,47.6 95.02,47.6 U4.GP14
  Bottom 0.406: v100.1,63.5 94.8,63.5 90.8,59.5 90.8,48.3 v91.5,47.6
SPD_DOWN
  Top 0.254: U7.6 58.88,21.23 57.8,22.3
  Top 0.406: R10.1 41.75,6.65 C5.2 43.4,9.3 44.3,10.2 44.3,20.5 45.8,22 45.8,23.4 47.8,25.4 56.9,25.4 57.8,24.5 57.8,22.3
SPD_UP
  Top 0.254: U7.5 59.95,21.88 59.05,22.77
  Top 0.406: R4.1 42.5,21.35 C2.2 42.55,22.2 46.75,26.4 57.33,26.4 59.05,24.68 59.05,22.77
SS
  Top 0.406: U4.GP17 77.08,47.59 95.4,65.92 R29.1
T1  (via drill 0.35)
  Top 0.254: v63.8,19.3 61.67,19.3 U7.9
  Top 0.406: 108.36,12.6 J1.2
  Top 0.508: D1.3 108.36,12.6
  Bottom 0.406: 69.5,13.6 v63.8,19.3
  Bottom 0.508: J1.2 107.44,13.6 69.5,13.6
T2  (via drill 0.35)
  Top 0.406: 108.34,24.8 J2.2 | v98.5,2 98.37,1.87
  Top 0.508: D2.3 108.34,24.8 | 98.37,1.87 U4.GP0
  Bottom 0.406: J2.2 109.6,24.74 118.7,15.64 118.7,3.5 116.7,1.5 101.2,1.5 100.7,2 v98.5,2
V_COMP
  Top 0.254: R34.1 108.4,52.65 U5.1
  Top 0.406: U1.6 103.56,32.87 102.85,32.15 | 102.85,32.15 102.8,32.1 99.3,32.1 98.9,32.5 C9.2 | C11.2 109.35,39 R36.2 | R36.2 111.3,34.4 | 111.3,34.4 R37.1 | R36.2 111.3,40.2 111.9,40.8 112,40.8 113.1,41.9 113.1,44.3 112.8,44.6 R28.2 R30.1 | U1.2 104.83,42.44 107,44.6 R30.1 | 102.85,32.15 104.2,30.8 109.8,30.8 111.3,32.3 111.3,34.4 | R30.1 109.2,49.8 R34.1
VBUSBAR  (via drill 0.35, 1.5 pad 2.5)
  Bottom 0.305: U3.1 8.48,13.32
  Bottom 0.508: 8.48,13.32 12.56,17.4 v17.9,17.4 | D3.A 5.5,21.83 5.5,15.8 U3.1
  Bottom 1.016: 31.04,25.26 24.8,19.02 | IN_MOTOR_DRIVER.16 21,28.7 21,19.1 v21.2,18.9 | v24,18.1 24.1,18.1 | v25.7,18.1 v24.8,19 | MOTOR_INPUT.8 MOTOR_INPUT.7 79.42,84.72 70.9,76.2 70.9,66.26 64.9,60.26 OUT_MOTOR_DRIVER.7 OUT_MOTOR_DRIVER.8 63.5,58.82 63.3,59.02 32.8,59.02 24.74,50.96 24.74,31.56 31.04,25.26 | v104,4 102.3,5.7 50.6,5.7 31.04,25.26
  other vias: 19,17.9 18.3,16.2 22.1,17.9 23.2,18.9 24,16.2 19.8,18.8 19.4,16.7 20.6,17.9 18.3,18.9 24.7,17.2 25.5,16.2 23.1,17.3
  pour Top (rank 2): 17.5,14.2 18.8,14.2 19,14.4 19,15.3 19.4,15.7 25.5,15.7 26.1,16.3 26.1,19.3 25.9,19.5 18.1,19.5 17.5,18.9
  pour Bottom: 7.76,12.04 11.33,15.61 25.84,15.61 26.53,16.3 26.53,19.3 26.33,19.5 14.24,19.5 7.76,13.02
VCC  (via drill 0.35, 1.5 pad 2.5)
  Top 0.406: U1.8 106.17,35.6 v107.3,35.6
  Top 0.813: v113.4,34.2 114.2,33.4 123.7,33.4 123.7,36.92 122,38.62 IR_SENSOR.3
  Top 1.016: HALL_SIM.1 HALL_SIM.2
  Bottom 0.508: v107.3,35.6 108.7,34.2 v113.4,34.2
  other vias: 21.68,8.87 23.16,8.86 24.66,8.89 25.67,7.87 26.58,6.86 27.41,7.88 27.5,6.11 26.65,4.89 25.79,3.8 26.87,2.93 24.81,2.95 23.96,3.87 24.87,4.91 25.64,5.96 24.66,6.84 23.9,7.91 23.2,6.77 24,5.85 23.15,4.87 22.41,5.81 21.75,6.85 22.41,7.89 21.67,4.78 22.45,3.87 23.11,2.86 21.71,2.9 109,4
  pour Bottom: 17.7,11.1 17.7,1.6 18,1.3 26.4,1.3 28.3,3.2 28.3,10.3 27.5,11.1
  pour Top: 17.8,11.1 17.8,1.6 18.1,1.3 26.5,1.3 28.4,3.2 28.4,10.3 27.6,11.1
  pour Top (isolate 0.254, rank 3): 0.3,93 126.4,93 126.4,-0.9 0.3,-0.9
VCC_PSU  (via drill 1.5 pad 2.5)
  Top 0.508: U3.2 11.9,18.78 C13.2
  Bottom 0.813: 6.7,26.8 6.7,17.14 U3.2
  Bottom 1.016: 6.7,26.8 3.4,30.1 v3,30.1

## Text on the board
tNames: GND | VCC_PSU | SPEED | FORCE | ON/OFF | VBUSBAR | << | << | 3v3 | GND
bNames: Carrier Motor Driver / v1-Sep22 | MUSOTOKU | F.P.O